# Altium PCB NavigationUnit.PcbDoc
Units mm, origin at the board's own origin, x right, y up, seen from the top; angles counter-clockwise.
Board outline 134.19 x 101.6 mm, 2 copper layers (Top Layer, Bottom Layer); 43 components, 38 nets, 290 pads, 73 vias.
Unrouted connection lines stored in the file: 2.
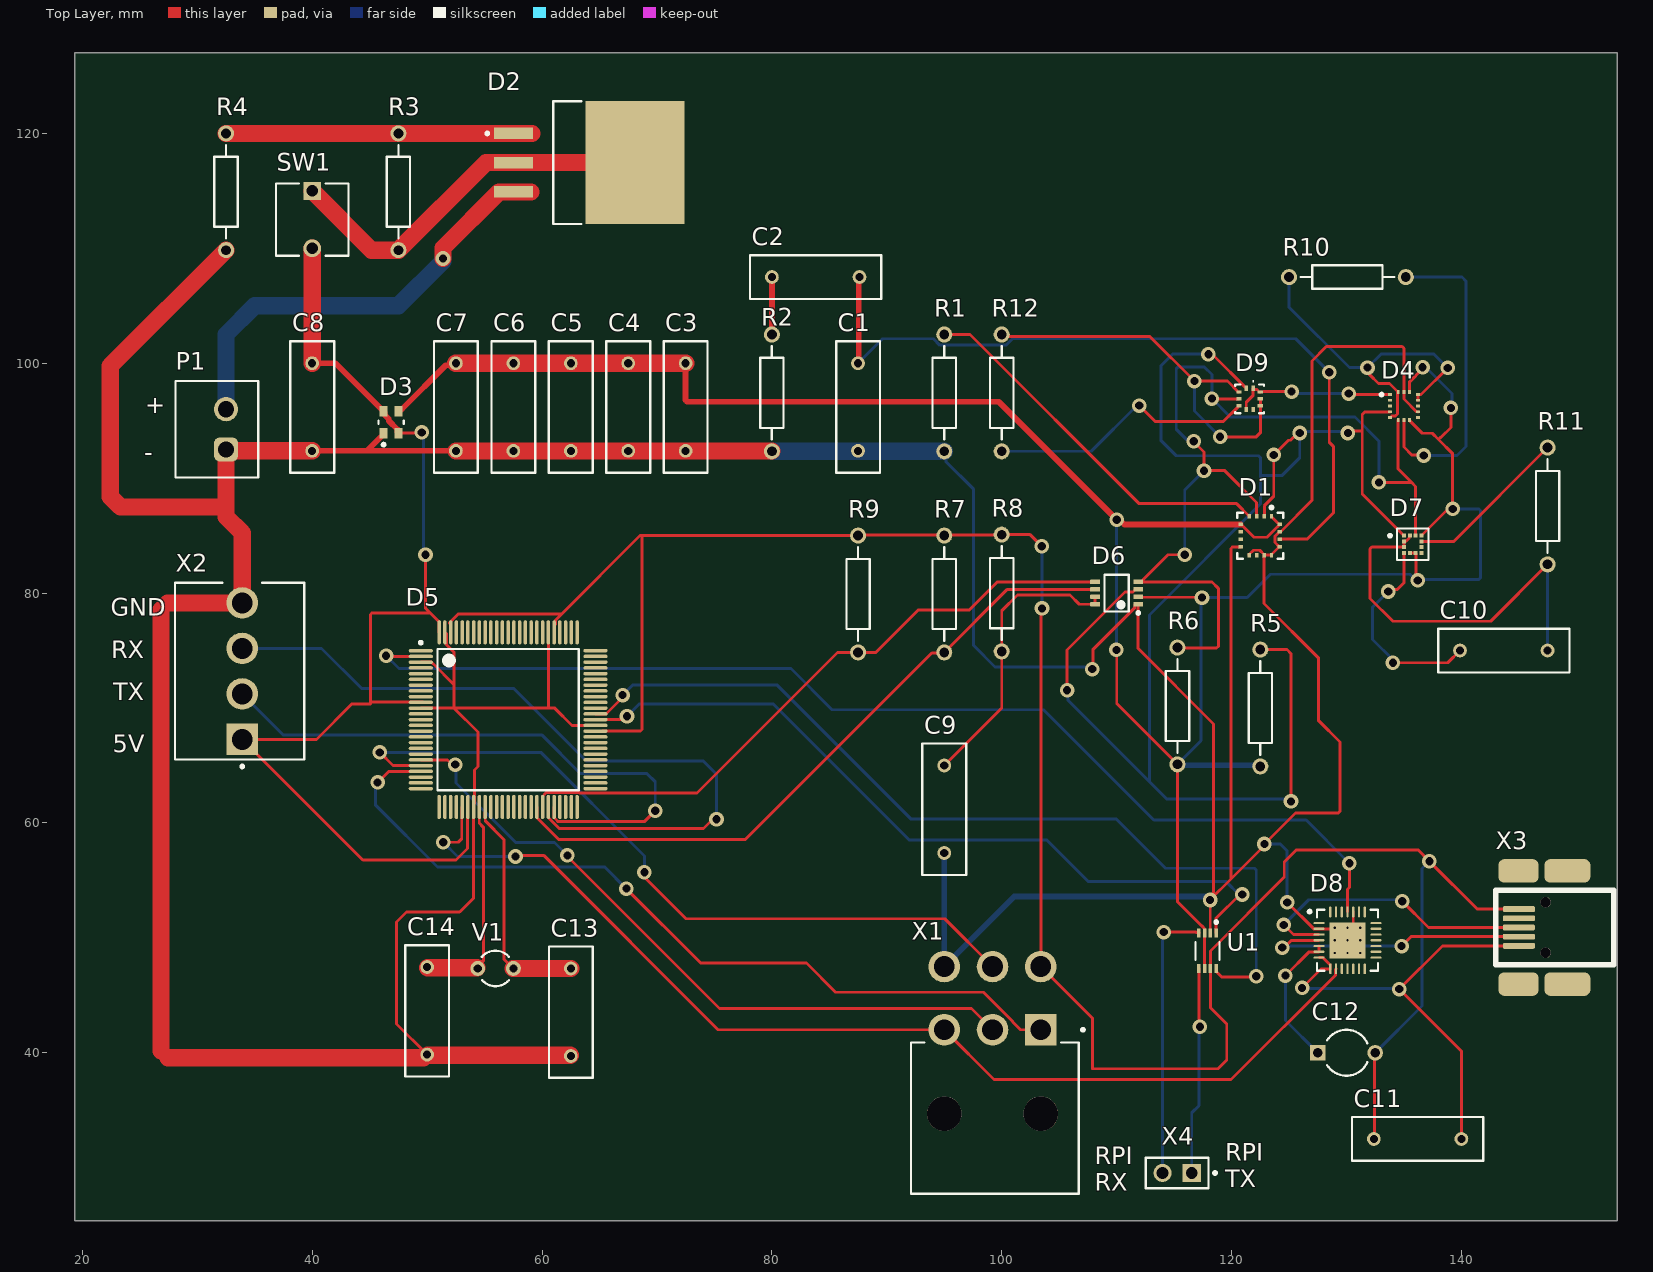
[diagram p0: Top Layer view]
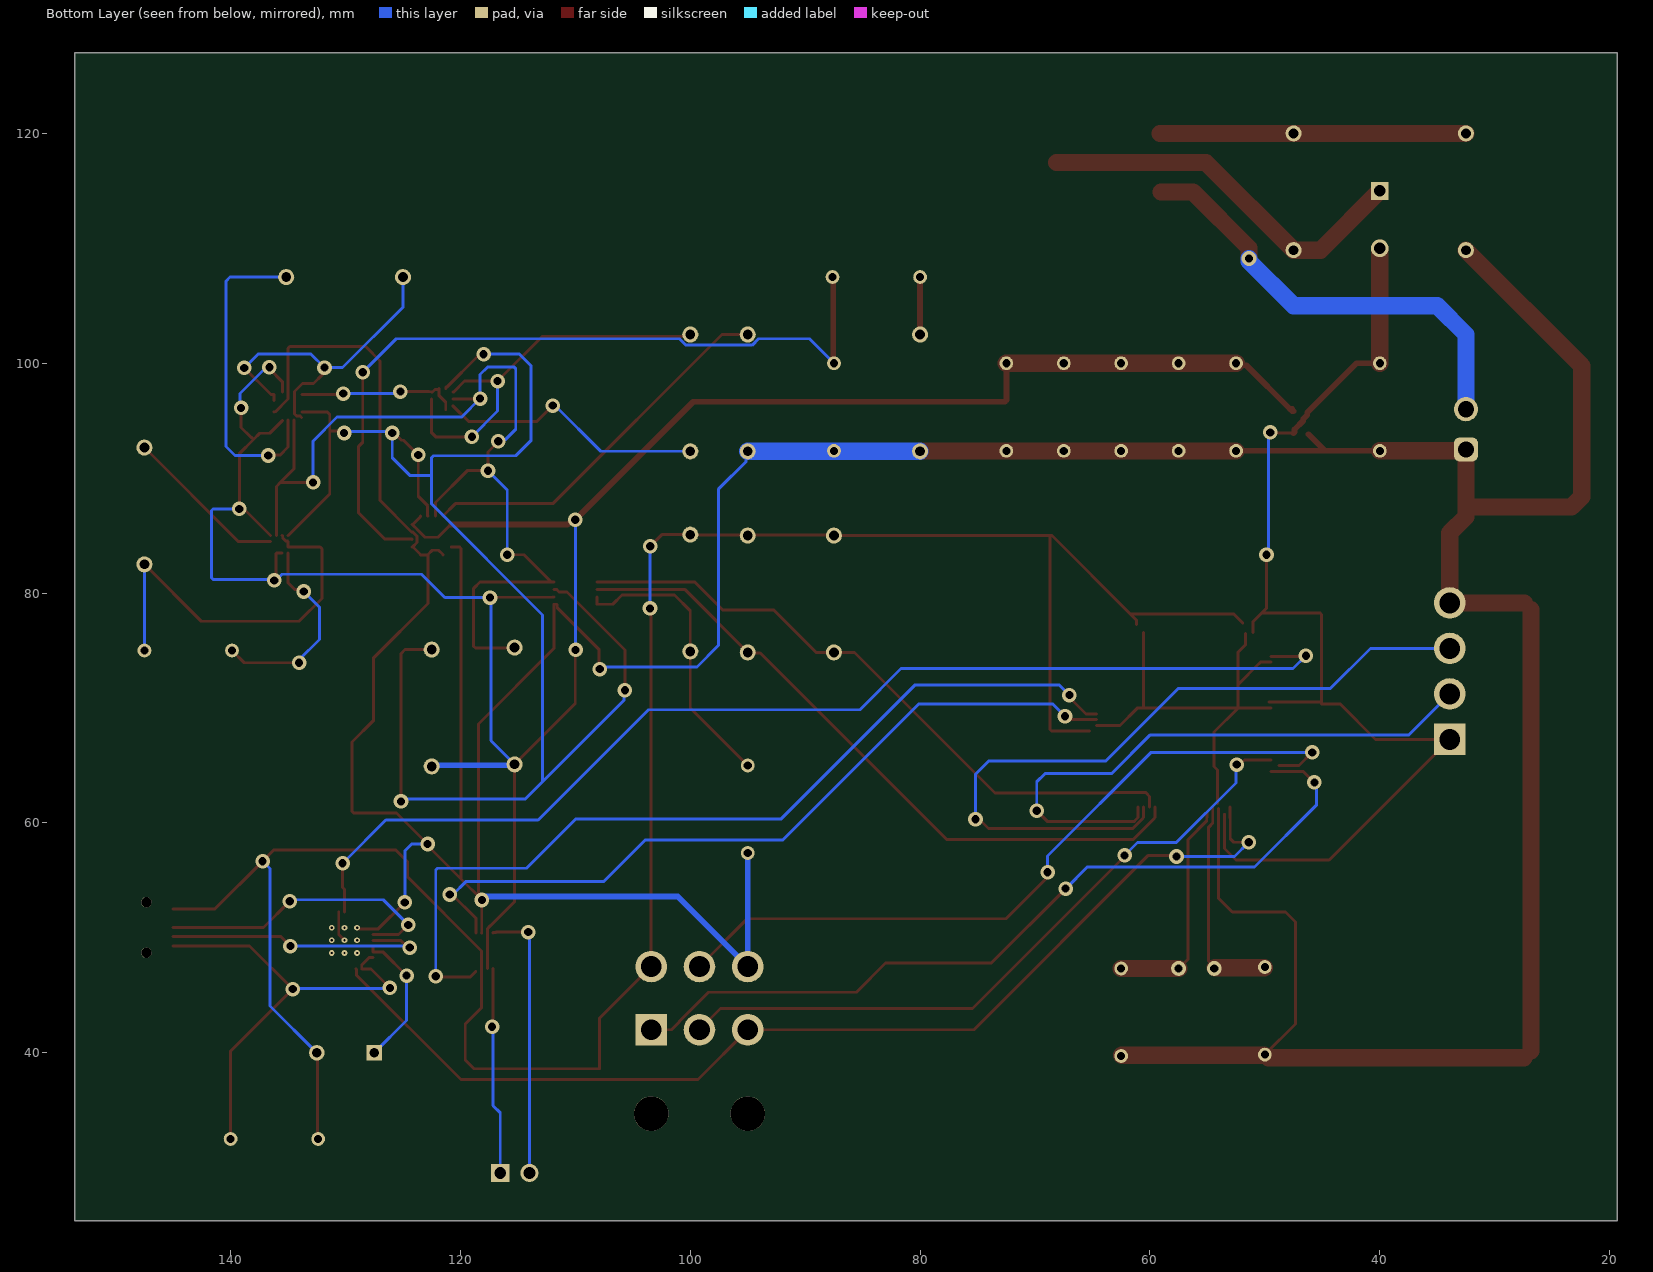
[diagram p1: Bottom Layer view, seen from below]

## Layer stack, top to bottom
Top Solder: solder mask 0.0102, Solder Resist, Dk 3.5
Top Layer: signal copper 0.0356
Dielectric 1: dielectric 0.32, FR-4, Dk 4.8
Bottom Layer: signal copper 0.0356
Bottom Solder: solder mask 0.0102, Solder Resist, Dk 3.5

## Board outline
19.355,25.4 153.543,25.4 153.543,127 19.355,127

## Design rules (kind name [scope] priority, off if disabled: settings)
Clearance [All] p1: gap=0.254 ignorepadtopadclearanceinfootprint=FALSE except(0: Arc-Hole Track-Hole SMDPad-Hole THPad-Hole Via-Hole Fill-Hole Poly-Hole Region-Hole Text-Hole; 0.1: Arc-Arc Arc-Track Arc-SMDPad Arc-THPad Arc-Via Track-Track Track-SMDPad Track-THPad Track-Via SMDPad-SMDPad SMDPad-THPad SMDPad-Via SMDPad-Fill SMDPad-Poly SMDPad-Region)
PolygonConnect [All] p1: connectstyle=Relief reliefconductorwidth=0.254 reliefentries=4 polygonreliefangle="90 Angle" airgapwidth=0.254
RoutingVias [All] p1: holewidth=0.711 width=1.27 viastyle="Through Hole" minholewidth=0.711 minwidth=1.27 maxholewidth=0.711 maxwidth=1.27
SolderMaskExpansion [All] p1: expansion=0.102 istentingtop=FALSE
Width [All] p1: maxlimit=1.5 minlimit=0.254 preferedwidth=0.254 minimp=50.000000 maximp=50.000000 favimp=50.000000
30 further rules are at their usual default settings.

## Components (designator, comment, footprint, x,y, rotation, side; value= is the part's Value field where it differs from the comment)
C1 "Cap" RAD-0.3 87.5,96.19 r270 top value=10nF
C2 "Cap" RAD-0.3 83.81,107.5 r180 top value=470nF
C3 "Cap" RAD-0.3 72.5,96.19 r90 top value=100nF
C4 "Cap" RAD-0.3 67.5,96.19 r90 top value=100nF
C5 "Cap" RAD-0.3 62.5,96.19 r90 top value=100nF
C6 "Cap" RAD-0.3 57.5,96.19 r90 top value=100nF
C7 "Cap" RAD-0.3 52.5,96.19 r90 top value=4.7uF
C8 "Cap" RAD-0.3 40,96.19 r90 top value=4.7uF
C9 "Cap" RAD-0.3 95,61.19 r90 top value=100pF
C10 "Cap" RAD-0.3 143.69,75 r180 top value=100nF
C11 "Cap" RAD-0.3 136.19,32.5 r180 top value=1uF
C12 "Cap2" CAPR5-4X5 130,40 r0 top value=4.7uF
C13 "Cap" RAD-0.3 62.503,43.527 r270 top value=22pF
C14 "Cap" RAD-0.3 50.003,43.647 r90 top value=22pF
D1 "L3G4200D" STM-LGA16-4X4X1.1 122.5,85 r270 top
D2 "TL783CKTTR" FP-KTT0003A-MFG 65.802,117.46 r270 top
D3 "NCP698SQ33T1G" FP-419C-02-MFG 46.863,94.869 r90 top
D4 "LIS331DLH" STM-LGA16-3X3X1 135,96.275 r0 top
D5 "ATmega640-16AU" 100A_M 57.048,68.986 r0 top
D6 "PCA9306DCTR" DCT0008A_L 110,80 r180 top
D7 "LIS3MDLTR" FP-VFLGA-12-8365767-MFG 135.762,84.25 r0 top
D8 "CP2103-GM" SLAB-QFN-28-3125x3125TP_A_M 130.091,49.784 r0 top
D9 "LPS25HBTR" STM-LGA-10 121.58,96.9 r270 top
P1 "691321100002" 691321100002 31.7,94.25 r90 top
R1 "Res2" AXIAL-0.4 95,97.42 r270 top value=10K
R2 "Res2" AXIAL-0.4 80,97.42 r270 top value=10K
R3 "Res2" AXIAL-0.4 47.5,114.92 r90 top value=75
R4 "Res2" AXIAL-0.4 32.5,114.92 r270 top value=220
R5 "Res2" AXIAL-0.4 122.5,70 r90 top value=3K
R6 "Res2" AXIAL-0.4 115.291,70.18 r90 top value=3K
R7 "Res2" AXIAL-0.4 95,79.92 r270 top value=4.7K
R8 "Res2" AXIAL-0.4 100,80 r90 top value=200K
R9 "Res2" AXIAL-0.4 87.5,79.92 r270 top value=4.7K
R10 "Res2" AXIAL-0.4 130.08,107.5 r180 top value=10K
R11 "Res2" AXIAL-0.4 147.5,87.58 r90 top value=10K
R12 "Res2" AXIAL-0.4 100,97.42 r90 top value=10K
SW1 "EVQ-22707K" FP-EVQ-22707K-MFG 40,112.5 r270 top
U1 "TXS0102QDCURQ1" FP-DCU0008A-MFG 117.907,48.87 r270 top
V1 "XTAL" R38 55.953,47.337 r270 top
X1 "39-30-1061" FP-39-30-1061-MFG 99.2,34.5 r0 top
X2 "09-65-2048" FP-09-65-2048-MFG 33.684,73.204 r270 top
X3 "67503-1020" MOLX-67503-1020_V 145,49.3 r180 top
X4 "TSW-102-07-G-S" FP-TSW-102-07-G-S-MFG 115.265,29.54 r180 top

## Footprints (in the part's own frame and the unit in brackets; to place one, negate y for a bottom-side part, rotate by r counter-clockwise, add the part's x,y. Pads: shape width x height; smd on the part's side, far side on the other; paste and mask are expansions set on the pad)
100A_M [mm] "Thin QFP, 100-Leads, Body 14x14mm, Pitch 0.5mm, IPC Low Density"
  oval 2.1x0.3 smd: 1(-7.6,6) 2(-7.6,5.5) 3(-7.6,5) 4(-7.6,4.5) 5(-7.6,4) 6(-7.6,3.5) 7(-7.6,3) 8(-7.6,2.5) 9(-7.6,2) 10(-7.6,1.5) 11(-7.6,1) 12(-7.6,0.5) 13(-7.6,0) 14(-7.6,-0.5) 15(-7.6,-1) 16(-7.6,-1.5) 17(-7.6,-2) 18(-7.6,-2.5) 19(-7.6,-3) 20(-7.6,-3.5) 21(-7.6,-4) 22(-7.6,-4.5) 23(-7.6,-5) 24(-7.6,-5.5) 25(-7.6,-6) 51(7.6,-6) 52(7.6,-5.5) 53(7.6,-5) 54(7.6,-4.5) 55(7.6,-4) 56(7.6,-3.5) 57(7.6,-3) 58(7.6,-2.5) 59(7.6,-2) 60(7.6,-1.5) 61(7.6,-1) 62(7.6,-0.5) 63(7.6,0) 64(7.6,0.5) 65(7.6,1) 66(7.6,1.5) 67(7.6,2) 68(7.6,2.5) 69(7.6,3) 70(7.6,3.5) 71(7.6,4) 72(7.6,4.5) 73(7.6,5) 74(7.6,5.5) 75(7.6,6)
  oval 0.3x2.1 smd: 26(-6,-7.6) 27(-5.5,-7.6) 28(-5,-7.6) 29(-4.5,-7.6) 30(-4,-7.6) 31(-3.5,-7.6) 32(-3,-7.6) 33(-2.5,-7.6) 34(-2,-7.6) 35(-1.5,-7.6) 36(-1,-7.6) 37(-0.5,-7.6) 38(0,-7.6) 39(0.5,-7.6) 40(1,-7.6) 41(1.5,-7.6) 42(2,-7.6) 43(2.5,-7.6) 44(3,-7.6) 45(3.5,-7.6) 46(4,-7.6) 47(4.5,-7.6) 48(5,-7.6) 49(5.5,-7.6) 50(6,-7.6) 76(6,7.6) 77(5.5,7.6) 78(5,7.6) 79(4.5,7.6) 80(4,7.6) 81(3.5,7.6) 82(3,7.6) 83(2.5,7.6) 84(2,7.6) 85(1.5,7.6) 86(1,7.6) 87(0.5,7.6) 88(0,7.6) 89(-0.5,7.6) 90(-1,7.6) 91(-1.5,7.6) 92(-2,7.6) 93(-2.5,7.6) 94(-3,7.6) 95(-3.5,7.6) 96(-4,7.6) 97(-4.5,7.6) 98(-5,7.6) 99(-5.5,7.6) 100(-6,7.6)
  silkscreen extent -7.72,-6.15 6.15,6.82, body extent -7,-7 7,7, height 1.6
691321100002 [mm] "Vertical PCB Header, pitch 3.5mm, 02p"
  rrect50% 2.1x2.1 hole 1.4: 1(-1.75,-0.8)
  round 2.1 hole 1.4: 2(1.75,-0.8)
  silkscreen extent -4.2,-3.6 4.2,3.6, body extent -4.2,-3.6 4.2,3.6, height 9.3
AXIAL-0.4 [mm] "Axial Device, Thru-Hole; 2 Leads; 0.4 in Pin Spacing"
  round 1.4 hole 0.85: 1(-5.08,0) 2(5.08,0)
  silkscreen extent -4.06,-1.02 4.06,1.02
CAPR5-4X5 [mm] "Capacitor; 2 Leads"
  rect 1.35x1.35 hole 0.8: 1(-2.5,0)
  round 1.35 hole 0.8: 2(2.5,0)
  silkscreen extent -1.69,-2 1.82,2
DCT0008A_L [mm] "SOP, 8-Leads, Body 2.9x3.2mm, Pitch 0.65mm, IPC High Density"
  rrect25% 0.85x0.4 smd: 1(-1.875,0.975) 2(-1.875,0.325) 3(-1.875,-0.325) 4(-1.875,-0.975) 5(1.875,-0.975) 6(1.875,-0.325) 7(1.875,0.325) 8(1.875,0.975)
  silkscreen extent -2,-1.6 1.05,1.85, body extent -2.01,-1.47 2.01,1.48, height 1.3
FP-09-65-2048-MFG [mm]
  rect 2.75x2.75 hole 1.8 paste-1000 mask+0: 1(5.94,0.225)
  round 2.75 hole 1.8 paste-1000 mask+0: 2(1.98,0.225) 3(-1.98,0.225) 4(-5.94,0.225)
  silkscreen extent -7.69,-5.63 8.41,5.63, body extent -7.79,-5.72 7.79,5.72, height 0.25
FP-39-30-1061-MFG [mm]
  rect 2.75x2.75 hole 1.8 paste-1000 mask+0: 1(4.2,7.5)
  round 2.75 hole 1.8 paste-1000 mask+0: 2(0,7.5) 3(-4.2,7.5) 4(4.2,13) 5(0,13) 6(-4.2,13)
  round 3 hole 3 unplated paste-1000 mask+0: ""(-4.2,0.2) ""(4.2,0.2)
  silkscreen extent -7.09,-6.78 7.99,7.62, body extent -7.19,-6.88 7.59,14.48, height 0.25
FP-419C-02-MFG [mm]
  rect 0.9x0.7 smd paste+0 mask+0: 1(-0.95,0.65) 2(-0.95,-0.65) 3(0.95,-0.65) 4(0.95,0.65)
  silkscreen extent -2.07,-1.1 0.13,1.1, body extent -1.5,-1.2 1.5,1.2, height 0.25
FP-DCU0008A-MFG [mm]
  rect 0.8x0.3 smd paste-1000 mask+0: 1(-1.55,0.75) 2(-1.55,0.25) 3(-1.55,-0.25) 4(-1.55,-0.75) 5(1.55,-0.75) 6(1.55,-0.25) 7(1.55,0.25) 8(1.55,0.75)
  silkscreen extent -2.62,-1.05 0.78,1.05, body extent -2.05,-1.3 2.05,1.3, height 0.25
FP-EVQ-22707K-MFG [mm]
  rect 1.55x1.55 hole 1 paste-1000 mask+0: A(-2.5,0)
  round 1.55 hole 1 paste-1000 mask+0: B(2.5,0)
  silkscreen extent -3.15,-3.15 3.15,3.15, body extent -3.37,-3.25 3.37,3.25, height 0.25
FP-KTT0003A-MFG [mm]
  rect 1x3.4 smd paste-1000 mask+0: 1(-2.54,-8.302) 2(0,-8.302) 3(2.54,-8.302)
  rect 10.7x8.6 smd paste-1000 mask+0: 4(0,2.297)
  silkscreen extent -5.33,-10.69 5.34,-2.38, body extent -5.45,-10.1 5.45,6.7, height 0.25
FP-TSW-102-07-G-S-MFG [mm]
  rect 1.57x1.57 hole 1.02 paste-1000 mask+0: 1(-1.27,0)
  round 1.57 hole 1.02 paste-1000 mask+0: 2(1.27,0)
  silkscreen extent -3.43,-1.34 2.73,1.33, body extent -2.83,-1.43 2.83,1.44, height 0.25
FP-VFLGA-12-8365767-MFG [mm]
  rect 0.375x0.35 smd paste+0 mask+0: 1(-0.763,0.75) 2(-0.763,0.25) 3(-0.763,-0.25) 4(-0.763,-0.75) 7(0.763,-0.75) 8(0.763,-0.25) 9(0.763,0.25) 10(0.763,0.75)
  rect 0.35x0.375 smd paste+0 mask+0: 5(-0.25,-0.762) 6(0.25,-0.762) 11(0.25,0.762) 12(-0.25,0.762)
  silkscreen extent -2.1,-1.37 1.37,1.38, body extent -1.58,-1.58 1.58,1.58, height 0.25
MOLX-67503-1020_V [mm] "Mini USB Connector, SMT, Righer Angle"
  rrect50% 2.8x0.5 smd: 1(0,0) 2(0,-0.8) 3(0,-1.6) 4(0,-2.4) 5(0,-3.2)
  rrect50% 3.5x2.05 smd: 6(0.025,3.325) 8(0.025,-6.525)
  rrect50% 4x2.05 smd: 7(-4.225,3.325) 9(-4.225,-6.525)
  round 0.9 hole 0.9 unplated: X(-2.325,-3.8) Y(-2.325,0.6)
  silkscreen extent -8.25,-4.85 2,1.65, body extent -8.22,-6.56 0.78,3.34, height 3.95
R38 [mm] "Crystal, Thru-Hole; 2 Leads; Body 3.1 x 8.2 mm (Dia.xH)"
  round 1.3 hole 0.7: 1(0,1.55) 2(0,-1.55)
  silkscreen extent -1.55,-1.19 1.55,1.17
RAD-0.3 [mm] "Radial Cap, Thru-Hole; 2 Leads; 0.3 in Pin Spacing"
  round 1.2 hole 0.7: 1(-3.81,0) 2(3.81,0)
  silkscreen extent -5.72,-1.9 5.71,1.91
SLAB-QFN-28-3125x3125TP_A_M [mm] "QFN, 28-Leads, Body 5x5mm, Pitch 0.5mm, Thermal Pad 3.13x3.13mm, IPC Low Density"
  oval 0.95x0.2 smd: 1(-2.475,1.5) 2(-2.475,1) 3(-2.475,0.5) 4(-2.475,0) 5(-2.475,-0.5) 6(-2.475,-1) 7(-2.475,-1.5) 15(2.475,-1.5) 16(2.475,-1) 17(2.475,-0.5) 18(2.475,0) 19(2.475,0.5) 20(2.475,1) 21(2.475,1.5)
  oval 0.2x0.95 smd: 8(-1.5,-2.475) 9(-1,-2.475) 10(-0.5,-2.475) 11(0,-2.475) 12(0.5,-2.475) 13(1,-2.475) 14(1.5,-2.475) 22(1.5,2.475) 23(1,2.475) 24(0.5,2.475) 25(0,2.475) 26(-0.5,2.475) 27(-1,2.475) 28(-1.5,2.475)
  rect 3.13x3.13 smd: 29(0,0)
  silkscreen extent -3.42,-2.65 2.65,2.65, body extent -2.5,-2.5 2.5,2.5, height 1
STM-LGA16-3X3X1 [mm] "LGA, 16-Leads, Body 3x3mm, Pitch 0.5mm"
  rect 0.35x0.25 smd mask+0.1: 1(-1.225,1) 2(-1.225,0.5) 3(-1.225,0) 4(-1.225,-0.5) 5(-1.225,-1) 9(1.225,-1) 10(1.225,-0.5) 11(1.225,0) 12(1.225,0.5) 13(1.225,1)
  rect 0.25x0.35 smd mask+0.1: 6(-0.5,-1.225) 7(0,-1.225) 8(0.5,-1.225) 14(0.5,1.225) 15(0,1.225) 16(-0.5,1.225)
  silkscreen extent -2.07,0.88 -1.83,1.12, body extent -1.5,-1.5 1.5,1.5, height 1
STM-LGA16-4X4X1.1 [mm] "LGA, 16-Leads, Body 4x4mm, Pitch 0.65mm"
  rect 0.4x0.3 smd mask+0.1: 1(-1.7,0.975) 2(-1.7,0.325) 3(-1.7,-0.325) 4(-1.7,-0.975) 9(1.7,-0.975) 10(1.7,-0.325) 11(1.7,0.325) 12(1.7,0.975)
  rect 0.3x0.4 smd mask+0.1: 5(-0.975,-1.7) 6(-0.325,-1.7) 7(0.325,-1.7) 8(0.975,-1.7) 13(0.975,1.7) 14(0.325,1.7) 15(-0.325,1.7) 16(-0.975,1.7)
  silkscreen extent -2.57,-2 2,2, body extent -2,-2 2,2, height 1.1
STM-LGA-10 [mm] "LGA, 10-Leads, Body 2.5x2.5mm, Pitch 0.6mm"
  rect 0.45x0.3 smd: 1(-0.92,0.3) 2(-0.92,-0.3) 6(0.92,-0.3) 7(0.92,0.3)
  rect 0.3x0.45 smd: 3(-0.6,-0.92) 4(0,-0.92) 5(0.6,-0.92) 8(0.6,0.92) 9(0,0.92) 10(-0.6,0.92)
  silkscreen extent -1.59,-1.25 1.25,1.25, body extent -1.25,-1.25 1.25,1.25, height 0.8

## Part data
C1 C2 C3 C4 C5 C6 C7 C8 C9 C10 C11 C12 C13 C14: "Capacitor", Publisher="Altium Limited"
  C1 C2 C3 C4 C5 C6 C7 C8 C9 C10 C11 C13 C14: LatestRevisionDate=17-Jul-2002, LatestRevisionNote="Re-released for DXP Platform.", PackageDescription="Radial Cap, Thru-Hole; 2 Leads; 0.3 in Pin Spacing", PackageReference=RAD-0.3, Published=8-Jun-2000
  C12: PackageDescription="Capacitor; 2 Leads", PackageReference=CAPR5-4X5, Published=23-Sep-2002
D1: library part CMP-0234-00071-2, "MEMS motion sensor: ultra-stable three-axis digital output gyroscope, -40 to +85°C, LGA-16 (4x4x1.1), Tray", ComponentLink1Description="L3G4200D Datasheet", ComponentLink1URL=http://www.st.com/internet/com/TECHNICAL_RESOURCES/TECHNICAL_LITERATURE/DATASHEET/CD00265057.pdf, ComponentLink2Description="L3G4200D Web Page", ComponentLink2URL=http://www.st.com/internet/analog/product/250373.jsp, ComponentLink3Description="st.com Home", ComponentLink3URL=http://www.st.com/internet/com/home/home.jsp, DatasheetVersion="rev3, Dec-2010", PackageDescription="16-Pin Land Grid Array Package, 4 x 4 x 1.1 mm Body, 0.65 mm Pitch", PackageReference=LGA16-4X4X1.1, PackageVersion=2010
D2: library part CMP-04917-000064-1, "IC REG LIN POS ADJ 700MA DDPAK", Case/Package=TO-263, Dropout Voltage=10V, Max Input Voltage=150V, Max Operating Temperature=125°C, Max Output Current=700mA, Max Output Voltage=125V, Min Input Voltage=21.5V, Min Operating Temperature=0°C, Min Output Voltage=1.25V, Package Quantity=1, Power Supply Rejection Ratio (PSRR)=76dB, Quiescent Current=15mA, Reference Voltage=1.3V, Height=4.44mm, Lead Free="Lead Free", Length=10.18mm, Min Current Limit=700mA, Mount="Surface Mount", Number of Outputs=1, Number of Pins=3, Number of Regulators=1, Output Current=700mA, Output Type=Adjustable, Output Voltage=125V, Packaging="Tape and Reel", Polarity=Positive, Radiation Hardening=No, REACH SVHC="No SVHC", Weight=0.050897oz, Width=8.41mm
D3: library part CMP-00278-07868312-1, "NCP698SQ33T1G Linear Voltage Regulator, CMOS LDO, Low Iq and Low IGND, 150 mA, V out : 3.3 V", Ambient Temperature Range High=85°C, Dropout Voltage=370mV, Input Bias Current=2.5µA, Manufacturer Lifecycle Status=ACTIVE, Max Input Voltage=6V, Max Junction Temperature (Tj)=150°C, Max Output Current=150mA, Min Operating Temperature=-40°C, Min Output Voltage=3.3V, Min Supply Voltage=4.3V, Output Voltage Accuracy=2%, Accuracy=2%, Halogen Free="Halogen Free", Height=990.6µm, Lead Free="Lead Free", Length=2.1844mm, Lifecycle Status=Production, Max Operating Temperature=85°C, Max Supply Voltage=6V, Mount="Surface Mount", NexarPartId=7868312, Nominal Output Voltage=3.3V, Nominal Supply Current=2.5µA, Number of Channels=1, Number of Outputs=1, Number of Pins=4, Number of Regulators=1, Operating Supply Voltage=6V, Output Current=150mA, Output Type=Fixed, Output Voltage=3.3V, Packaging="Tape & Reel (TR)", Polarity=Positive, Quiescent Current=2.5µA, Radiation Hardening=No, REACH SVHC="No SVHC", RoHS=Compliant, Schedule B="8542390000, 8542390000", Width=1.3462mm
D4: library part CMP-0234-00067-3, "MEMS motion sensor: Ultra low power high performance 3-axis nano accelerometer, -40 to +85°C, LGA-16 (3x3x1), Tray", Manufacturer=STMicroelectronics, ComponentLink1Description="Manufacturer URL", ComponentLink1URL=http://www.st.com/, ComponentLink2Description="LIS331DLH Datasheet", ComponentLink2URL=http://www.st.com/internet/com/TECHNICAL_RESOURCES/TECHNICAL_LITERATURE/DATASHEET/CD00213470.pdf, ComponentLink3Description="LIS331DLH Web Page", ComponentLink3URL=http://www.st.com/internet/analog/product/218132.jsp, DatasheetVersion="rev3, Jul-2009", PackageDescription="16-Pin Land Grid Array, 3 x 3 x 1 mm Body, 0.5 mm Pitch", PackageReference=LGA16-3X3X1, PackageVersion=2008, RevisionNote="PCB layout corrected."
D5: library part CMP-0095-00194-2, "8-bit AVR Microcontroller, 2.7-5.5V, 8MHz, 64KB Flash, 4KB EEPROM, 8KB SRAM, 86 GPIO pins, 100-pin TQFP, Industrial Grade (-40°C to 85°C), Pb-Free", Code_JEDEC=MS-026-AED, ComponentLink1Description="Manufacturer URL", ComponentLink1URL=http://www.atmel.com/, ComponentLink2Description="ATmega640/1280/1281/2560/2561 Datasheet", ComponentLink2URL=http://www.atmel.com/dyn/resources/prod_documents/doc2549.pdf, ComponentLink3Description="ATmega640/1280/1281/2560/2561 Summary", ComponentLink3URL=http://www.atmel.com/dyn/resources/prod_documents/2549S.pdf, DatasheetVersion="revN, May-2011", PackageDescription="100-Pin Thin Profile Plastic Quad Flat Pack (TQFP), 14 x 14 x 1.0 mm Body, 0.5 mm Pitch", PackageReference=100A, PackageVersion="revD, Oct-2010", RevisionNote="DatasheetVersion & PackageVersion updated. URLs added."
D6: library part CMP-0314-00283-2, "Dual Bi-Directional I2C-Bus and SMBus Voltage Level-Translator, 0 to 5.5 V, -40 to 85 degC, 8-pin SM8 (DCT), Green (RoHS & no Sb/Br)", 5V Tolerant I/O=Yes, Manufacturer="Texas Instruments", Max Frequency(kHz)=400, On-Chip Power-on-Reset=No, Rating=Catalog, Code_JEDEC=MO-187-DA, ComponentLink1Description=Datasheet, ComponentLink1URL=http://www.ti.com/general/docs/lit/getliterature.tsp?genericPartNumber=PCA9306&fileType=pdf, ComponentLink2Description="Package Specification", ComponentLink2URL=http://www.ti.com/litv/pdf/mpds049b, DatasheetVersion=SCPS113J, Eco-Plan="Green (RoHS & no Sb/Br)", Enable Pin=Yes, fSCLK(Max)(MHz)=400, Function="Voltage Translator", Mounting Technology="Surface Mount", No. of Outputs=2, Open Drain I/O Type=Yes, PackageDescription="8-Pin Thin Small Outline Package 3 x 2.8 mm Body ,0.65 mm Pitch", PackageReference=DCT0008A, PackageVersion="revC, Sep-2002", PartNumber=PCA9306DCTR, SubFamily="I2C Special Function", tpd max(ns)=1.5, Vcc range(V)="0 to 5.5"
D7: library part CMP-2000-07463-2, "SENSOR MR I2C/SPI 12LGA", Manufacturer=STMicroelectronics, Max Supply Voltage=3.6V, Min Supply Voltage=1.71V, Operating Supply Current=40-270uA, Package=VFLGA-12-8365767, Temperature="-40°C to +85°C", Temperature Range High=+85°C, Temperature Range Low=-40°C, Automotive=No, Category=IC, ComponentLink2Description=Datasheet, ComponentLink2URL=https://www.st.com/resource/en/datasheet/lis3mdl.pdf, Device Class L1=Sensors, Device Class L2="Magnetic Sensors", Device Class L3=unset, Digikey Description="SENSOR MR I2C/SPI 12LGA", Footprint Url=https://www.st.com/content/ccc/resource/technical/document/technical_note/73/17/9c/16/dd/96/4a/01/CD00134799.pdf/files/CD00134799.pdf/jcr:content/translations/en.CD00134799.pdf, Height=1mm, Lead Free=Yes, Manufacturer Part Number=LIS3MDLTR, Mouser Description="Board Mount Hall Effect / Magnetic Sensors Ultra Lo-Pwr Hi Perf 3-Axis 1.9-3.6V", Octopart=https://octopart.com/lis3mdltr-stmicroelectronics-29403125, RoHS=TRUE, Sensing Method=Magnetic, Sensor Output=I2C,SPI
D8: library part CMP-0511-00006-1, "Single-Chip USB to UART Bridge, 1024 Bytes EEPROM, -40 to 85 degC, 28-pin QFN, Tube", Manufacturer="Silicon Labs", ComponentLink1Description="Manufacturer URL", ComponentLink1URL=http://www.silabs.com/, ComponentLink2Description=Datasheet, ComponentLink2URL=http://www.silabs.com/Support%20Documents/TechnicalDocs/CP2103.pdf, ComponentLink3Description="Package Specification", ComponentLink3URL=http://www.silabs.com/Support%20Documents/TechnicalDocs/C8051F35x.pdf, DatasheetVersion="Rev. 1.0", EEPROM="1024 Bytes", Internal Oscillator=TRUE, Mounting Technology="Surface Mount", PackageDescription="28-Pin Quad-Flat No-Leads Package, Body 5 x 5 mm, Pitch 0.5 mm", PackageReference=QFN-28, PartNumber=CP2103-GM, Sub-Family="USB Bridges"
D9: library part CMP-2000-06573-1, "MEMS Pressure Sensor: 260 - 1260 hPa Absolute Digital Output Barometer, 1.7 to 3.6 V, -30 to 105 degC, 10-Pin LGA, RoHS, Tape and Reel", Manufacturer=STMicroelectronics, Operating Pressure=3.77PSI~18.27PSI(26kPa~126kPa), Operating Temperature=-30°C~105°C, Package / Case=10-VFLGA, Package Description="10-Pin Holed Land Grid Array, Body 2.5 x 2.5 mm, Pitch 0.6 mm", Package Reference=LGA-10, PartNumber=LPS25HB, Supplier Device Package=10-LLGA(2.5x2.5), Voltage - Supply=1.7V~3.6V, Accuracy=±0.003PSI(±0.02kPa), Category=Sensors,Transducers, Datasheet URL=http://www.st.com/st-web-ui/static/active/en/resource/technical/document/datasheet/DM00141379.pdf, Datasheet Version="Rev. 2, 05/2015", Family=PressureSensors,Transducers, Features=TemperatureCompensated, Manufacturer URL=http://www.st.com/, Maximum Pressure=290.08PSI(2000kPa), Mounting Technology=SurfaceMount, Output=24b, Output Type=I²C,SPI, Package URL=http://www.st.com/st-web-ui/static/active/en/resource/technical/document/datasheet/DM00141379.pdf, Port Size=-, Port Style=NoPort, Pressure Type=Absolute, Series=-, Termination Style=SolderPad
P1: library part CMP-1502-01783-2, Color=Green, Current=10A, Max Operating Temperature=105°C, Min Operating Temperature=-40°C, Voltage=300V, Contact Material=Brass, Current Rating=10A, Gender=Male, Height=7.2mm, Lead Free="Lead Free", Lead Pitch=3.5mm, Length=7mm, Mount="Through Hole", NexarPartId=18818340, Number of Contacts=2, Number of Levels=1, Number of Pins=2, Number of Positions Per Level=2, Number of Rows=1, Orientation=Vertical, Packaging=Box, Pitch=3.5052mm, REACH SVHC=Unknown, RoHS=Compliant, Termination=Solder, Voltage Rating=300V, Width=8.1mm
R1 R2 R3 R4 R5 R6 R7 R8 R9 R10 R11 R12: "Resistor", LatestRevisionDate=17-Jul-2002, LatestRevisionNote="Re-released for DXP Platform.", PackageDescription="Axial Device, Thru-Hole; 2 Leads; 0.4 in Pin Spacing", PackageReference=AXIAL-0.4, Published=8-Jun-2000, Publisher="Altium Limited"
SW1: library part CMP-05618-000065-1, "SWITCH TACTILE SPST-NO 0.02A 15V", Actuator Color=Black, Case/Package=Radial, Contact Current Rating=20mA, Contact Resistance=50mR, Max Operating Temperature=70°C, Max Voltage Rating (DC)=15V, Min Operating Temperature=-20°C, Operating Force=2.6N, Package Quantity=1, Actuator Length=3.6mm, Actuator Type=Standard, Current Rating=20mA, Electrical Life=50000Cycles, Illumination Type=Non-Illuminated, Lead Free="Lead Free", Mechanical Life=50000Cycles, Mount="Through Hole", Orientation=Straight, Packaging="Tape and Reel", Radiation Hardening=No, RoHS Compliant=Yes, Series=EVQ2, Size=6mm, Switch Function=Off-Mom, Switch Travel=0.25mm, Termination="PC Pin", Throw Configuration=SPST, Voltage Rating (DC)=15V
U1: library part CMP-0859-00579-4, "IC TRNSLTR BIDIRECTIONAL US8", Ambient Temperature Range High=+125°C, Ambient Temperature Range Low=-40°C, Manufacturer="Texas Instruments", Max Junction Temp=+150°C, Max Supply Voltage=5.5V, Min Supply Voltage=1.65V, Nominal Supply Current=25uA, Package=DCU0008A, Temperature="-40°C to +125°C", Automotive=Yes, Automotive Grade="Grade 1", Category=IC, ComponentLink2Description=Datasheet, ComponentLink2URL=http://www.ti.com/lit/ds/symlink/txs0102-q1.pdf, Data Rate=2-24Mbits/s, Device Class L1="Integrated Circuits (ICs)", Device Class L2="Logic ICs", Device Class L3="Voltage Level Shifters", Digikey Description="IC TRNSLTR BIDIRECTIONAL US8", Height=0.9mm, Lead Free=Yes, Logic Function Desc=Non-Inverting, Manufacturer Part Number=TXS0102QDCURQ1, Mouser Description="2-Bit Bidirectional Voltage-Level Translator For Open-Drain And Push-Pull Applications", Number of Circuits=1, Number Of Inputs=1, Number of Outputs=1, Octopart=https://octopart.com/txs0102qdcurq1-texas+instruments-46957249, Propagation Delay=0.5-50ns, RoHS=TRUE, Standoff Height=0mm, Temperature Range High=+125°C, Temperature Range Low=-40°C, V A Max=3.6V, V A Min=1.65V, V B Max=5.5V, V B Min=2.3V
V1: "Crystal Oscillator", LatestRevisionDate=17-Jul-2002, LatestRevisionNote="Re-released for DXP Platform.", PackageDescription="Crystal, Thru-Hole; 2 Leads; Body 3.1 x 8.2 mm (Dia.xH)", PackageReference=R38, Published=8-Jun-2000, Publisher="Altium Limited"
X1: library part CMP-00257-00276738-1, "39-30-1061 Connector Wire to Board Header 6 Position 4.2mm Solder Right Angle Thru-Hole Tray", Color=Natural, Contact Resistance=10mΩ, Current Rating=8A, Flammability Rating="UL94 V-2", Insulation Resistance=1GΩ, Max Current Rating=5A, Max Operating Temperature=105°C, Min Operating Temperature=-40°C, Voltage Rating=600V, Contact Gender=Male, Contact Material="Brass, Gold", Contact Plating=Gold, Depth=19.4mm, ELV=Compliant, Gender=Male, Glow Wire Compliant=Non-compliant, Halogen Free="Low Halogen", Height=5.57mm, Housing Color=Natural, Housing Material=Nylon, Lead Free="Lead Free", Lead Pitch=4.2mm, Length=13.8mm, Material=Brass, Mount="Surface Mount, Through Hole", NexarPartId=276738, Number of Circuits=6, Number of Contacts=6, Number of Ports=1, Number of Positions=6, Number of Rows=2, Number of Terminals=6, Orientation="Right Angle", Packaging=Bulk, Pitch=4.2mm, Radiation Hardening=No, REACH SVHC=Unknown, RoHS=Compliant, Row Spacing=4.2mm, Schedule B=8536694040, Termination=Solder, Voltage Rating (DC)=600V
X2: library part CMP-04776-000474-1, "CONN HEADER VERT 4POS 3.96MM", Contact Resistance=10mR, Current Rating=7A, Flammability Rating="UL94 V-2", Housing Color=Natural, Insulation Resistance=1GR, Max Current Rating=3A, Max Operating Temperature=105°C, Max Voltage Rating (AC)=250V, Min Operating Temperature=-40°C, Package Quantity=6000, Contact Gender=Male, Contact Material=Brass, Contact Plating=Tin, Depth=2.29mm, Gender=Male, Glow Wire Compliant=Non-compliant, Height=2.03mm, Housing Material=Nylon, Lead Free="Lead Free", Length=12.88mm, Mount="Through Hole", Number of Contacts=4, Number of Positions=4, Number of Rows=1, Orientation=Straight, Packaging=Bulk, Pitch=3.96mm, Radiation Hardening=No, RoHS Compliant=Yes, Series=5273, Termination="Through Hole", Voltage Rating=250V, Voltage Rating (DC)=250V
X3: library part CMP-0411-00002-1, "USB, MINI, SMD, RA KME04-USBMU03A01", Manufacturer=Molex, ComponentLink1Description="Manufacturer URL", ComponentLink1URL=http://www.molex.com/, ComponentLink2Description=Datasheet, ComponentLink2URL=http://www.molex.com/pdm_docs/sd/675031020_sd.pdf, DatasheetVersion="Rev F, 06/2009", Mounting Technology="Surface Mount", PackageDescription="Mini USB Connector, SMT, Righer Angle", PackageReference=67503-1020, PartNumber=67503-1020, Terminal Pitch="0.8 mm"
X4: library part CMP-02766-000084-1, "CONN HEADER VERT 2POS 2.54MM", Current Rating=6.3A, Manufacturer=Samtec, Temperature="-55°C to +125°C", Temperature Range High=+125°C, Temperature Range Low=-55°C, Voltage Rating=550V, Automotive=No, Category=Conn, ComponentLink2Description=Datasheet, ComponentLink2URL=http://suddendocs.samtec.com/catalog_english/tsw_th.pdf, Conn Gender=Male, Conn Orientation=Straight, Contact Material=Gold,Nickel, Device Class L1=Connectors, Device Class L2="Headers and Wire Housings", Device Class L3=unset, Digikey Description="CONN HEADER VERT 2POS 2.54MM", Footprint Url=http://suddendocs.samtec.com/prints/tsw-xxx-xx-x-x-xx-xxx-footprint.pdf, Height=8.71mm, Lead Free=Yes, Manufacturer Part Number=TSW-102-07-G-S, Mouser Description="Conn Unshrouded Header HDR 2 POS 2.54mm Solder ST Thru-Hole Automotive Bulk", Number of Contacts=2, Number of Rows=1, Octopart=https://octopart.com/tsw-102-07-g-s-samtec-272197, Package=TSW-102-07-G-S, Pitch=2.54mm, RoHS=TRUE

## Via types
v1: diameter 1.27, hole 0.711, Top Layer to Bottom Layer, 64 vias
v2: diameter 0.5, hole 0.2, Top Layer to Bottom Layer, 9 vias

## Nets (pads, with @x,y where several pads share a name; then routed paths per layer and width w, separated by ;. In a path a pad name is that pad's centre, name@x,y a point inside that pad or via, vN(x,y) a via of type N, cw(c..) or ccw(c..) an arc to the next point about the centre after c; other vN are vias at no path point)
GND: C1.2 C3.1 C4.1 C5.1 C6.1 C7.1 C8.1 C9.1 C13.2 C14.1 D1.8 D1.9 D1.11 D1.12 D1.13 D1.15 D3.1 D4.10 D4.15 D5.3 D5.11 D5.32 D5.62 D5.81 D5.99 D6.1 D8.2 D8.24 D8.29 P1.1 R1.2 R2.2 R4.2 U1.2 X1.6 X2.4 | length 489.1
  Top Layer w0.254: P1.1 P1.1@32.62,92.38 ; D3.1@46.213,93.819 D3.1 ; D5.11 52.349,69.986 ; D5.3 50.361,73.986 50.484,73.863 50.505,73.863 52.349,72.019 ; C14.1@50.063,39.777 C14.1 47.346,42.495 47.346,51.384 48.209,52.248 52.832,52.248 53.035,52.451 54.026,53.442 D5.32@54.026,61.265 ; D5.99@51.671,76.479 51.671,75.53 51.714,75.488 52.349,74.852 52.349,72.019 ; D5.32@54.118,61.674 54.118,64.596 54.432,64.911 54.432,67.904 52.349,69.986 ; D5.81 60.548,70.135 60.4,69.986 ; C13.2@62.443,39.777 C13.2 ; D5.62 62.603,68.486 61.103,69.986 60.4,69.986 ; v1(107.874,73.381) 107.925,73.431 107.925,75.075 111.577,78.727 111.577,78.952 111.65,79.025 D6.1 111.875,75.169 118.427,68.617 118.427,53.856 ; U1.2 118.146,50.43 118.146,53.279 v1(118.135,53.289) 118.135,53.315 119.939,55.118 ; D1.8 120.088,84.025 119.939,83.876 119.939,55.118 ; D1.9 121.525,83.35 121.902,83.727 122.448,83.727 122.825,83.35 D1.11 ; v1(124.841,53.086) 127.143,50.784 128.891,50.784 v2(128.991,50.884) ; v2(130.091,49.784) 130.591,50.284 D8.24 ; D4.15@134.998,97.548 134.998,101.299 134.849,101.448 128.245,101.448 127,100.203 127,88.075 124.25,85.325 D1.15 124.15,85.325 123.773,84.948 123.773,84.402 124.15,84.025 D1.13 124.177,84.002 124.127,84.002 123.475,83.35 D1.12 D1.11 ; D4.15 135,96.879 136.102,95.777 136.223,95.777 D4.10 ; 52.349,69.986 52.349,72.019 ; 52.349,69.986 60.4,69.986 ; 119.939,55.118 122.86,58.039 v1(122.86,58.166) 125.552,60.858 129.29,60.858 129.438,61.007 129.438,67.038 127.583,68.894 127.583,74.329 122.825,79.087 D1.11
  Top Layer w0.5: C8.1 44.774,92.38 ; D3.1@46.213,93.819 44.774,92.38 ; C7.1@52.52,92.36 C7.1 44.774,92.38 ; R2.2@79.98,92.36 R2.2
  Top Layer w1: 26.848,40.183 27.457,39.573 ; 26.848,78.558 27.434,79.144 ; 32.5,88.725 32.664,88.561 ; C14.1@49.685,39.573 49.949,39.837 C14.1
  Top Layer w1.5: 26.848,40.183 26.848,78.558 ; 27.434,79.144 X2.4 33.909,85.239 32.5,86.648 32.5,88.725 P1.1 ; 27.457,39.573 C14.1@49.685,39.573 ; 32.351,87.5 23.307,87.5 22.428,88.379 22.428,99.768 R4.2 ; P1.1@32.62,92.38 C8.1 ; C14.1@50.063,39.777 C13.2@62.443,39.777 ; C7.1@52.52,92.36 R2.2@79.98,92.36
  Bottom Layer w0.254: R1.2 95.135,92.205 95.135,91.454 97.561,89.027 97.561,75.438 99.424,73.575 107.679,73.575 v1(107.874,73.381) ; v1(122.86,58.166) 124.235,58.166 124.841,57.56 v1(124.841,53.086)
  Bottom Layer w0.5: C9.1 X1.6 101.094,53.594 v1@117.843,53.594
  Bottom Layer w1.5: R2.2 R1.2
  other v2: 128.991,48.684 130.091,48.684 131.191,48.684 128.991,49.784 131.191,49.784 130.091,50.884 131.191,50.884
NetC1_1: C1.1 C2.1 D1.14 | length 69.1
  Top Layer w0.254: C1.1 C1.1@87.56,100.06 ; C2.1@87.56,107.44 C2.1 ; D1.14 124.223,84.698 126.594,84.698 128.854,86.959 128.854,92.77 128.499,93.126 v1(128.499,99.212)
  Top Layer w0.5: C1.1@87.56,100.06 C2.1@87.56,107.44
  Bottom Layer w0.254: C1.1 89.633,102.133 94.056,102.133 94.616,101.573 100.384,101.573 100.944,102.133 125.578,102.133 v1(128.499,99.212)
NetC2_2: C2.2 R2.1 | length 5
  Top Layer w0.5: R2.1 C2.2
NetC3_2: C3.2 C4.2 C5.2 C6.2 C7.2 D1.1 D1.5 D1.16 D3.3 D4.1 D4.8 D4.14 D6.2 D7.5 D7.6 D7.10 D9.1 D9.6 D9.10 R5.1 R6.1 U1.3 U1.6 | length 233.6
  Top Layer w0.254: v1(109.982,75.057) 110.007,75.032 110.007,70.383 R6.1 115.291,53.137 117.381,51.047 117.401,51.047 117.534,50.914 117.534,50.894 117.634,50.794 117.634,50.443 U1.3 U1.6 ; D6.2 111.911,79.639 117.388,79.639 v1(117.424,79.604) ; D1.5 120.85,85.975 120.873,85.952 121.964,84.861 123.086,84.861 123.773,85.548 123.773,85.569 123.906,85.702 123.927,85.702 124.127,85.902 124.127,85.952 D1.16@124.15,85.975 ; D9.6 121.28,96.612 121.88,97.212 D9.1@121.88,97.745 ; D9.1 D9.1@121.88,97.745 ; D1.1 123.475,86.65 D1.16@124.15,85.975 ; D1.16 D1.16@124.15,85.975 ; v1@125.22,97.534 122.73,97.534 122.718,97.523 122.523,97.523 D9.10 122.425,97.5 122.203,97.722 121.903,97.722 D9.1@121.88,97.745 ; v1(130.2,97.358) 130.284,97.275 D4.1 ; D4.14 135.5,98.394 136.627,99.521 v1(136.627,99.644) ; D4.8@135.502,95.002 136.597,93.907 137.462,93.907 138.009,93.36 ; D7.5 D7.6 136.06,83.44 136.06,81.237 v1(136.195,81.102) ; D7.10 136.537,85 138.668,87.131 139.048,87.131 v1(139.243,87.325) 139.243,92.126 138.009,93.36 ; v1(139.09,96.114) 139.09,94.412 138.236,93.557 138.206,93.557 138.009,93.36
  Top Layer w0.5: D3.3 47.613,95.819 47.613,96.019 47.813,96.019 51.619,99.825 52.325,99.825 C7.2 ; C3.2 72.492,99.992 72.492,96.796 72.64,96.647 99.746,96.647 v1(110.007,86.385) 110.282,86.385 110.693,85.975 D1.5
  Top Layer w1.5: C7.2 C6.2 C5.2 C4.2 C3.2
  Bottom Layer w0.254: v1(109.982,75.057) 109.995,75.07 109.995,86.373 v1(110.007,86.385) ; R6.1@115.381,65.01 R6.1 117.348,67.158 117.348,79.527 v1(117.424,79.604) 121.361,79.604 123.393,81.636 135.538,81.636 136.071,81.102 v1(136.195,81.102) 136.271,81.178 141.507,81.178 141.656,81.327 141.656,87.176 141.507,87.325 v1(139.243,87.325) ; R5.1@122.41,65.01 R5.1 ; v1(125.222,97.536) 125.4,97.358 v1(130.2,97.358) ; v1(136.627,99.644) 136.902,99.644 137.226,99.319 137.231,99.319 139.175,97.375 139.175,96.199 v1(139.09,96.114)
  Bottom Layer w0.5: R6.1@115.381,65.01 R5.1@122.41,65.01
NetC8_2: C8.2 C11.2 C12.2 D3.2 D3.4 D5.10 D5.31 D5.61 D5.80 D5.98 D5.100 R7.1 R8.2 R9.1 SW1.B U1.7 X1.4 X2.1 X3.5 | length 303.1
  Top Layer w0.254: D3.2 v1@49.164,93.919 ; D5.10@49.632,70.51 45.06,70.51 ; v1(49.86,83.337) 49.86,78.675 50.252,78.283 ; D5.100 51.048,77.486 50.252,78.283 ; D5.98@51.925,77.394 51.925,77.397 52.691,78.162 61.691,78.162 ; D5.31@53.518,60.757 53.518,57.781 52.505,56.769 44.404,56.769 X2.1 40.375,67.264 43.474,70.363 45.06,70.363 45.06,70.51 ; D5.80@61.171,77.267 61.171,77.643 61.691,78.162 ; D5.61@65.256,67.995 68.558,67.995 68.707,68.144 68.707,85 ; v1(103.48,84.074) 102.474,85.08 R8.2 99.96,85.04 87.54,85.04 R9.1 68.529,85 61.691,78.162 ; v1(103.505,78.664) 103.4,78.559 X1.4 107.899,43.001 107.899,38.608 118.821,38.608 119.583,39.37 119.583,42.507 118.151,43.939 118.151,47.314 U1.7 118.157,48.865 124.587,55.296 124.587,56.591 125.654,57.658 136.22,57.658 v1(137.211,56.667) 141.377,52.501 X3.5@144.999,52.501 ; C11.2 132.44,32.56 132.44,39.94 C12.2 ; 45.06,70.51 45.06,78.134 45.208,78.283 50.252,78.283
  Top Layer w0.5: C8.2 42.032,100 D3.4 46.313,95.719 46.313,95.506 46.659,95.16 46.659,94.994 47.413,94.24 47.413,94.019 D3.2
  Top Layer w1.5: C8.2 SW1.B
  Bottom Layer w0.254: v1(49.53,93.98) 49.695,93.815 49.695,83.502 v1(49.86,83.337) ; v1(103.48,84.074) 103.505,84.049 v1(103.505,78.664) ; C12.2 136.576,44.076 136.576,56.032 v1(137.211,56.667)
NetC9_2: C9.2 D6.7 D6.8 R8.1 | length 25.2
  Top Layer w0.254: C9.2 100,70 R8.1 100,78.461 101.371,79.832 105.943,79.832 106.751,79.025 D6.8 D6.7
NetC10_1: C10.1 D7.2 D7.3 D7.12 R11.1 | length 34.5
  Top Layer w0.254: D7.12 135.465,84.964 135.465,84.781 135.232,84.548 135.048,84.548 D7.2 D7.3 132.203,84 132.055,83.851 132.055,79.527 134.036,77.546 142.546,77.546 R11.1
  Bottom Layer w0.254: C10.1 R11.1
NetC10_2: C10.2 D7.4 | length 18.1
  Top Layer w0.254: v1(133.629,80.137) 133.788,80.295 134.4,80.295 135,80.895 D7.4 ; v1(134.036,73.939) 138.819,73.939 C10.2
  Bottom Layer w0.254: v1(133.629,80.137) 132.258,78.765 132.258,75.968 134.036,74.19 v1(134.036,73.939)
NetC11_1: C11.1 D8.7 D8.8 X3.1 | length 40.5
  Top Layer w0.254: v1(126.136,45.644) 127.781,47.288 128.57,47.288 D8.8 128.591,47.63 D8.8@128.564,47.657 ; D8.7 127.937,48.284 D8.8@128.564,47.657 ; C11.1 140,40.137 v1(134.595,45.542) 138.352,49.3 X3.1
  Bottom Layer w0.254: v1(126.136,45.644) 126.187,45.593 134.544,45.593 v1(134.595,45.542)
NetC12_1: C12.1 D8.5 D8.6 | length 12.2
  Top Layer w0.254: v1(124.689,46.711) 126.762,48.784 D8.6 D8.5
  Bottom Layer w0.254: v1(124.689,46.711) 124.689,42.811 C12.1
NetC13_1: C13.1 D5.34 V1.1 | length 19.6
  Top Layer w0.254: D5.34@55.042,60.9 55.042,60.481 55.057,60.465 55.057,60.183 56.673,58.567 56.673,48.168 V1.1
  Top Layer w1.5: V1.1 C13.1
NetC14_2: C14.2 D5.33 V1.2 | length 18.9
  Top Layer w0.254: C14.2 C14.2@50.063,47.397 ; V1.2@54.343,47.397 V1.2 54.403,47.523 54.889,48.009 54.889,59.632 54.534,59.988 54.534,61.372 D5.33
  Top Layer w1.5: C14.2@50.063,47.397 V1.2@54.343,47.397
NetD1_2: D1.2 D4.4 D6.3 D7.1 D9.2 R5.2 | length 143.7
  Top Layer w0.254: v1(105.689,71.552) 105.689,75.057 110.734,80.102 111.427,80.102 111.65,80.325 D6.3 ; v1(117.983,100.787) 118.177,100.593 118.507,100.593 121.182,97.918 121.257,97.918 121.28,97.895 D9.2 ; R5.2 124.819,75.08 125.171,74.728 v1(125.171,61.874) ; D1.2 122.848,86.723 122.848,87.593 123.673,88.417 v1(123.673,92.024) 124.948,93.3 125.128,93.3 125.759,93.931 v1(125.933,93.931) ; v1(130.124,93.931) 130.3,94.107 131.369,94.107 ; D4.4 131.611,95.775 131.369,95.533 131.369,94.107 ; D7.1 134.987,85 134.939,85.048 134.939,85.06 131.369,88.631 131.369,94.107
  Bottom Layer w0.254: v1(105.689,71.552) 105.754,71.487 105.754,70.687 112.852,63.589 ; v1(117.983,100.787) 114.859,100.787 113.843,99.771 113.843,93.294 115.187,91.95 122.351,91.95 122.5,91.801 122.5,90.246 ; v1(125.171,61.874) 124.977,62.069 124.523,62.069 124.514,62.078 114.364,62.078 112.852,63.589 ; v1(130.124,93.931) 130.012,94.043 125.997,94.043 125.933,93.98 125.933,91.77 124.409,90.246 122.5,90.246 ; 112.852,63.589 112.852,78.105 122.5,87.753 122.5,90.246
NetD1_3: D1.3 D4.6 D6.4 D7.11 D9.4 R6.2 | length 86.9
  Top Layer w0.254: D6.4 D6.4@112.1,80.975 ; R6.2 115.341,75.209 118.698,75.209 118.847,75.358 118.847,80.416 118.288,80.975 D6.4@112.1,80.975 ; v1(115.926,83.337) 114.462,83.337 D6.4@112.1,80.975 ; v1(116.713,93.218) 116.713,93.17 117.602,92.281 v1(117.602,90.653) 119.405,90.653 122.175,87.883 D1.3 ; v1@118.261,96.9 D9.4 ; v1(132.817,89.637) 135.658,89.637 ; D4.6 134.5,90.795 135.658,89.637 ; D7.11 136.012,89.282 135.658,89.637
  Bottom Layer w0.254: v1(115.926,83.337) 115.926,88.976 v1(117.602,90.653) ; v1(116.713,93.218) 116.586,93.345 116.103,93.345 115.189,94.259 115.189,99.517 115.363,99.691 117.607,99.691 118.288,99.011 v1(118.288,96.926) 119.888,95.326 130.734,95.326 132.817,93.243 v1(132.817,89.637)
NetD1_4: D1.4 R1.1 | length 33.1
  Top Layer w0.254: R1.1 97.246,102.5 111.963,87.782 120.443,87.782 D1.4
NetD2_1: D2.1 R3.2 R4.1 | length 26.6
  Top Layer w1.5: R4.1 R3.2 D2.1 D2.1@59.131,120
NetD2_2: D2.2 D2.4 R3.1 SW1.A | length 33.4
  Top Layer w1.5: SW1.A 45.16,109.84 R3.1 55.12,117.46 D2.2 D2.4
NetD2_3: D2.3 P1.2 | length 38.8
  Top Layer w1.5: v1(51.384,109.118) 51.384,110.033 56.261,114.91 D2.3@59.03,114.91
  Bottom Layer w1.5: P1.2 32.5,102.5 35,105 47.5,105 51.384,108.884 v1(51.384,109.118)
NetD4_5: D4.5 D4.12 D4.13 D4.16 R10.2 | length 30.1
  Top Layer w0.254: v1(131.826,99.619) 132.02,99.424 132.02,99.001 132.774,98.247 133.753,98.247 134.452,97.548 134.452,95.601 134.303,95.452 134.281,95.452 134.252,95.423 133.969,95.423 D4.5@133.823,95.277 ; D4.12 D4.13 136.493,97.275 v1(138.811,99.593)
  Bottom Layer w0.254: R10.2 125,104.87 130.251,99.619 v1(131.826,99.619) 133.02,100.813 137.592,100.813 v1(138.811,99.593)
NetD4_7: D4.7 R10.1 | length 28.2
  Top Layer w0.254: D4.7 135,92.711 135.712,91.999 136.703,91.999 v1(136.728,91.973)
  Bottom Layer w0.254: R10.1 140.048,107.5 140.411,107.137 140.411,92.761 139.624,91.973 v1(136.728,91.973)
NetD5_2: D5.2 D8.25 | length 98.5
  Top Layer w0.254: v1(46.431,74.549) 46.494,74.486 D5.2 ; D8.25 130.091,54.22 130.251,54.38 v1(130.251,56.49)
  Bottom Layer w0.254: v1(46.431,74.549) 47.549,73.431 81.661,73.431 85.242,69.85 103.632,69.85 113.233,60.249 126.492,60.249 130.099,56.642 v1@130.124,56.642
NetD5_20: D5.20 X1.2 | length 60.4
  Top Layer w0.254: D5.20 51.764,65.486 52.176,65.075 v1(52.451,65.075) ; v1(62.205,57.175) 62.205,57.074 75.438,43.84 97.36,43.84 X1.2
  Bottom Layer w0.254: v1(52.451,65.075) 52.522,65.004 52.522,63.48 57.709,58.293 61.087,58.293 v1(62.205,57.175)
NetD5_21: D5.21 X1.5 | length 65.5
  Top Layer w0.254: v1(45.872,66.142) 47.02,64.994 D5.21@48.768,64.994 ; v1(68.91,55.702) 68.961,55.651 68.961,55.22 72.517,51.664 95.036,51.664 X1.5
  Bottom Layer w0.254: v1(45.872,66.142) 59.893,66.142 68.91,57.125 v1(68.91,55.702)
NetD5_22: D5.22 X1.1 | length 72.2
  Top Layer w0.254: v1(45.695,63.525) 46.656,64.486 D5.22 ; v1(67.335,54.28) 73.812,47.803 83.007,47.803 85.545,45.265 98.418,45.265 100.956,42.727 100.956,42.688 101.644,42 X1.1
  Bottom Layer w0.254: v1(45.695,63.525) 45.52,63.351 45.52,61.541 50.902,56.159 65.456,56.159 v1(67.335,54.28)
NetD5_30: D5.30 D8.9 X1.3 | length 95.1
  Top Layer w0.254: v1(51.41,58.318) 52.706,58.318 53.01,58.622 53.01,60.435 53.048,60.474 D5.30 ; v1(57.689,57.075) 57.794,57.181 60.142,57.181 75.323,42 X1.3 99.332,37.668 119.962,37.668 129.041,46.748 129.041,47.259 D8.9
  Bottom Layer w0.254: v1(51.41,58.318) 52.653,57.075 v1(57.689,57.075)
NetD5_43: D5.43 D6.6 R7.2 | length 59.3
  Top Layer w0.254: D5.43 59.548,60.474 59.671,60.351 59.671,60.33 61.429,58.572 77.704,58.572 93.919,74.787 94.947,74.787 R7.2 100.485,80.325 D6.6
NetD5_44: D5.44 D6.5 R9.2 | length 56.8
  Top Layer w0.254: D5.44 60.048,62.299 60.171,62.422 60.171,62.443 60.392,62.663 63.205,62.663 63.259,62.609 73.481,62.609 85.711,74.84 R9.2 89.039,74.84 92.71,78.511 97.143,78.511 99.606,80.975 D6.5
NetD5_45: D5.45 X2.3 | length 66.1
  Top Layer w0.254: D5.45 60.548,60.474 60.671,60.351 60.671,60.33 61.489,59.512 74.041,59.512 74.914,60.385 75.124,60.385 v1(75.184,60.325)
  Bottom Layer w0.254: X2.3 40.818,75.184 44.323,71.679 57.556,71.679 63.83,65.405 74.016,65.405 75.184,64.237 v1(75.184,60.325)
NetD5_46: D5.46 X2.2 | length 51.9
  Top Layer w0.254: D5.46 61.048,60.474 61.171,60.351 61.171,60.33 61.392,60.109 68.898,60.109 v1(69.85,61.062)
  Bottom Layer w0.254: X2.2 37.467,67.666 59.969,67.666 63.322,64.313 69.113,64.313 69.85,63.576 v1(69.85,61.062)
NetD5_63: D5.63 U1.1 | length 68.1
  Top Layer w0.254: D5.63 66.827,68.986 67.116,69.275 v1(67.391,69.275) ; U1.1 118.657,51.702 120.726,53.772 v1(120.929,53.772)
  Bottom Layer w0.254: v1(67.391,69.275) 68.449,70.333 80.137,70.333 91.973,58.496 103.952,58.496 107.559,54.889 119.537,54.889 120.654,53.772 v1(120.929,53.772)
NetD5_64: D5.64 U1.8 | length 78.3
  Top Layer w0.254: D5.64 65.561,69.486 65.684,69.609 65.705,69.609 67.005,70.91 v1(67.005,71.12) ; U1.8@118.665,47.062 118.68,47.047 118.698,47.047 119.136,46.609 122.098,46.609 v1(122.149,46.66)
  Bottom Layer w0.254: v1(67.005,71.12) 67.869,71.984 80.467,71.984 92.126,60.325 109.997,60.325 114.264,56.058 122,56.058 122.149,55.909 v1(122.149,46.66)
NetD7_9: D7.9 R11.2 | length 14.4
  Top Layer w0.254: D7.9 139.34,84.5 R11.2
NetD8_3: D8.3 X3.3 | length 25.8
  Top Layer w0.254: v1(124.536,51.13) 125.382,50.284 127.354,50.284 127.381,50.311 127.408,50.284 D8.3 ; v1(134.849,53.188) 137.136,50.9 X3.3
  Bottom Layer w0.254: v1(124.536,51.13) 126.721,53.315 134.722,53.315 v1(134.849,53.188)
NetD8_4: D8.4 X3.2 | length 24.5
  Top Layer w0.254: v1(124.409,49.149) 124.576,49.149 125.211,49.784 D8.4 ; v1(134.798,49.276) 135.622,50.1 X3.2
  Bottom Layer w0.254: v1(124.409,49.149) 124.562,49.301 134.772,49.301 v1(134.798,49.276)
NetD9_3: D9.3 D9.8 D9.9 R12.2 | length 35.1
  Top Layer w0.254: R12.2 100.163,102.337 112.878,102.337 v1(116.764,98.45) 119.635,98.45 120.585,97.5 D9.3 ; v1(118.999,93.599) 122.148,93.599 122.5,93.951 D9.8 D9.9
  Bottom Layer w0.254: v1(116.764,98.45) 116.764,95.834 v1(118.999,93.599)
NetD9_5: D9.5 R12.1 | length 23.5
  Top Layer w0.254: v1(111.963,96.317) 113.36,94.92 119.28,94.92 D9.5
  Bottom Layer w0.254: R12.1 107.783,92.34 111.76,96.317 v1(111.963,96.317)
NetU1_4: U1.4 X4.2 | length 24.1
  Top Layer w0.254: v1(114.097,50.495) 116.891,50.495 116.916,50.47 117.134,50.47 117.157,50.447 U1.4
  Bottom Layer w0.254: X4.2 113.995,50.394 v1(114.097,50.495)
NetU1_5: U1.5 X4.1 | length 18.9
  Top Layer w0.254: X4.1 X4.1@117.069,30.074 ; U1.5 117.157,42.355 v1(117.246,42.266)
  Bottom Layer w0.254: X4.1 116.535,34.773 117.157,35.395 117.157,42.177 v1(117.246,42.266)
pads on no net: D1.6 D1.7 D1.10 D4.2 D4.3 D4.9 D4.11 D5.1 D5.4 D5.5 D5.6 D5.7 D5.8 D5.9 D5.12 D5.13 D5.14 D5.15 D5.16 D5.17 D5.18 D5.19 D5.23 D5.24 D5.25 D5.26 D5.27 D5.28 D5.29 D5.35 D5.36 D5.37 D5.38 D5.39 D5.40 D5.41 D5.42 D5.47 D5.48 D5.49 D5.50 D5.51 D5.52 D5.53 D5.54 D5.55 D5.56 D5.57 D5.58 D5.59 D5.60 D5.65 D5.66 D5.67 D5.68 D5.69 D5.70 D5.71 D5.72 D5.73 D5.74 D5.75 D5.76 D5.77 D5.78 D5.79 D5.82 D5.83 D5.84 D5.85 D5.86 D5.87 D5.88 D5.89 D5.90 D5.91 D5.92 D5.93 D5.94 D5.95 D5.96 D5.97 D7.7 D7.8 D8.1 D8.10 D8.11 D8.12 D8.13 D8.14 D8.15 D8.16 D8.17 D8.18 D8.19 D8.20 D8.21 D8.22 D8.23 D8.26 D8.27 D8.28 D9.7 X1. X3.4 X3.6 X3.7 X3.8 X3.9 X3.X X3.Y

## Silkscreen, mask and mechanical layers (free items; w line width, h text height)
Top Overlay:
  text "+" at 25.451,95.656 h1.52
  text "-" at 25.375,91.516 h1.52
  text "GND" at 22.454,78.029 h1.52
  text "RX" at 22.504,74.32 h1.52
  text "TX" at 22.708,70.663 h1.52
  text "5V" at 22.657,66.142 h1.52
  text "RPI / TX" at 119.431,28.296 h1.52
  text "RPI / RX" at 108.077,27.991 h1.52